# Altium PCB SA100002-FTRAP-B.PcbDoc
Units mm, origin at the board's own origin, x right, y up, seen from the top; angles counter-clockwise.
Board outline 25 x 14 mm, 2 copper layers (Top Layer, Bottom Layer); 7 components, 30 nets, 23 pads, 0 vias.
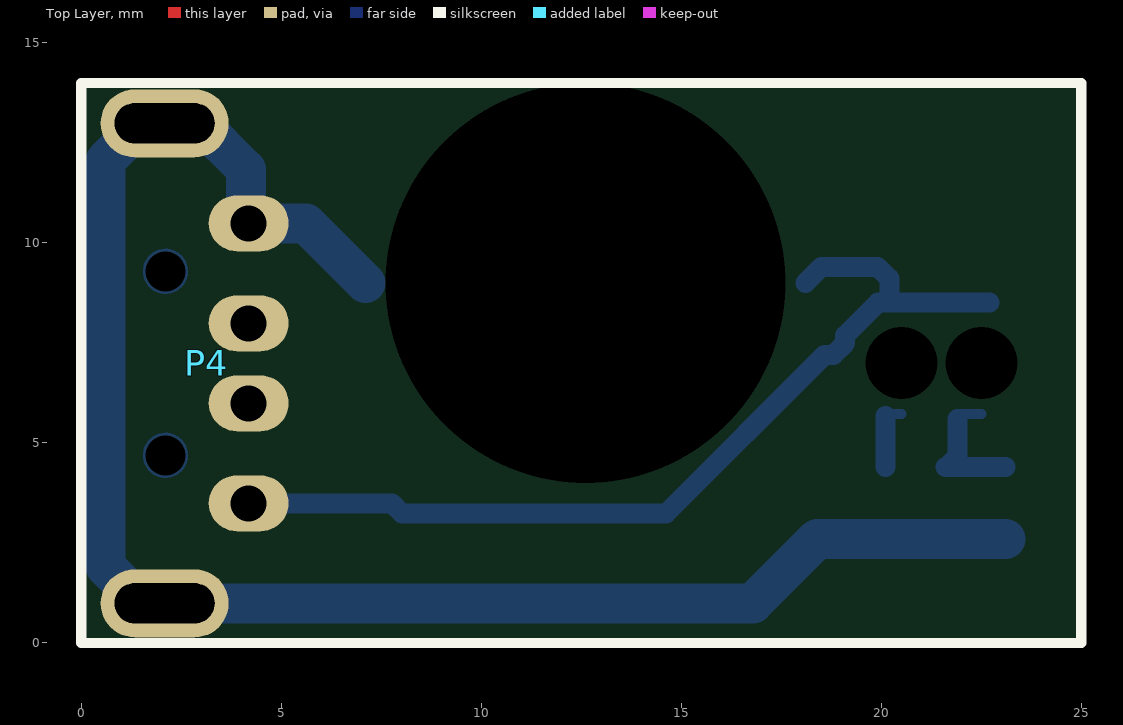
[diagram p0: Top Layer view]
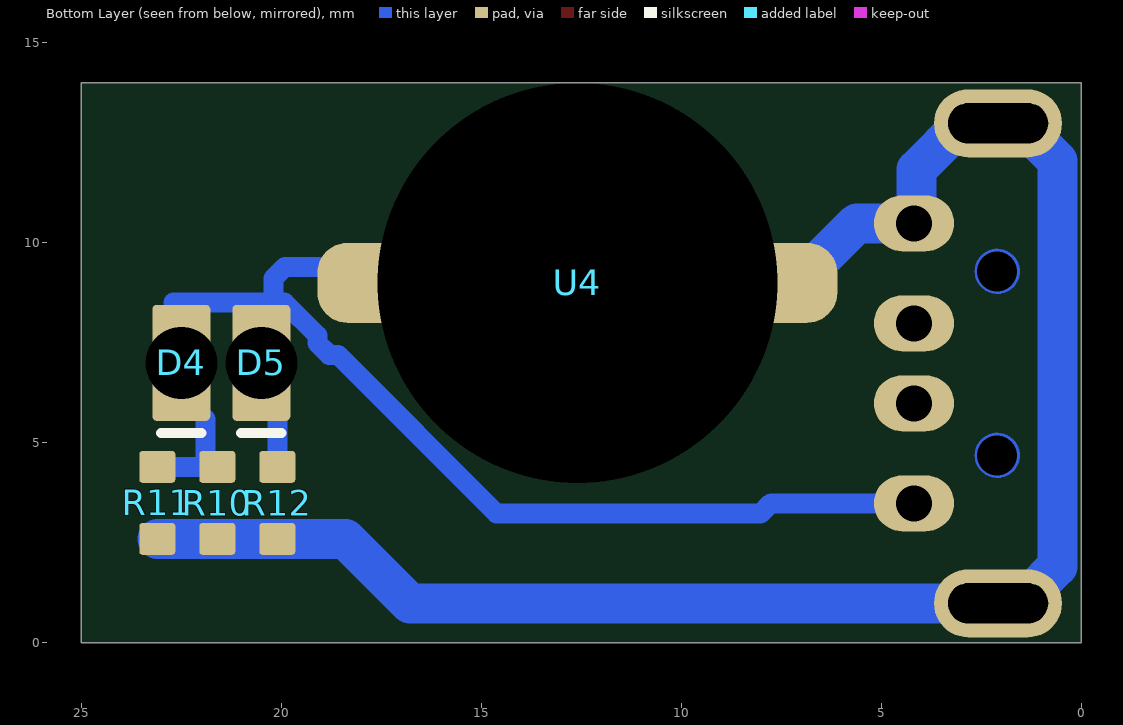
[diagram p1: Bottom Layer view, seen from below]

## Layer stack, top to bottom
Top Solder: solder mask 0.0102, Solder Resist, Dk 3.5
Top Layer: signal copper 0.0356
Dielectric 1: dielectric 0.32, FR-4, Dk 4.8
Bottom Layer: signal copper 0.0356
Bottom Solder: solder mask 0.0102, Solder Resist, Dk 3.5

## Board outline
0,0 0,14 25,14 25,0

## Design rules (kind name [scope] priority, off if disabled: settings)
Clearance [All] p1: gap=0.254 ignorepadtopadclearanceinfootprint=FALSE except(0: Arc-Hole Track-Hole SMDPad-Hole THPad-Hole Via-Hole Fill-Hole Poly-Hole Region-Hole Text-Hole)
DiffPairsRouting [All] p1: maxlimit=0.254 minlimit=0.254 mostfreqgap=0.254 toplayer_minwidth=0.381 toplayer_maxwidth=0.381 toplayer_prefwidth=0.381 bottomlayer_minwidth=0.381 bottomlayer_maxwidth=0.381 bottomlayer_prefwidth=0.381 maxuncoupledlength=12.7
PolygonConnect [All] p1: connectstyle=Relief reliefconductorwidth=0.254 reliefentries=4 polygonreliefangle="90 Angle" airgapwidth=0.254
RoutingVias [All] p1: holewidth=0.711 width=1.27 viastyle="Through Hole" minholewidth=0.711 minwidth=1.27 maxholewidth=0.711 maxwidth=1.27
SolderMaskExpansion [All] p1: expansion=0.102 istentingtop=FALSE
Width [All] p1: maxlimit=2 minlimit=0.254 preferedwidth=0.254 minimp=50.000000 maximp=50.000000 favimp=50.000000
29 further rules are at their usual default settings.

## Classes and differential pairs
differential pair class USB: D0 D1
component class 01-PLAN-B: D4 D5 P4 R11 R12 U4
differential pair D1: +D1_P -D1_N
differential pair D0: +D0_P -D0_N

## Components (designator, comment, footprint, x,y, rotation, side; value= is the part's Value field where it differs from the comment)
D4 "LED" LED_0805_INVERTED 22.5,7 r90 bottom
D5 "LED" LED_0805_INVERTED 20.5,7 r90 bottom
P4 "440247-2" "USB A type r/a male DIP" 3.083,6.988 r270 top
R10 "=Value" R0603_NOSILK 21.6,3.5 r270 bottom
R11 "=Value" R0603_NOSILK 23.1,3.5 r270 bottom
R12 "=Value" R0603_NOSILK 20.1,3.5 r270 bottom
U4 "HCS0905H" HCS09H_THROUGH_HOLE 12.6,9 r270 bottom locked

## Footprints (in the part's own frame and the unit in brackets; to place one, negate y for a bottom-side part, rotate by r counter-clockwise, add the part's x,y. Pads: shape width x height; smd on the part's side, far side on the other; paste and mask are expansions set on the pad)
HCS09H_THROUGH_HOLE [mm]
  rrect75% 2x4 smd: 1(0,4.5) 2(0,-4.5)
  round 1.524 hole 10 unplated: None(0,0)
  body extent -4.5,-4.5 6,4.5
LED_0805_INVERTED [mm]
  oval 0.1x0.11 hole 1.8 unplated: 9(0,0)
  rrect20% 1.1x1.45 smd: A(0.9,0) C(-0.9,0)
  silkscreen extent -1.75,-0.5 -1.75,0.5, body extent -1.01,-0.62 1.01,0.63, height 0.5
R0603_NOSILK [mm]
  rrect20% 0.8x0.9 smd: 1(-0.9,0) 2(0.9,0)
  body extent -0.8,-0.4 0.8,0.4, height 0.45
"USB A type r/a male DIP" [mm]
  oval 1.4x2 hole 0.9: 1(3.5,1.1) 2(1,1.1) 3(-1,1.1) 4(-3.5,1.1)
  round 0.8 hole 1 unplated mask+0: None(-2.3,-0.98) None(2.3,-0.98)
  oval 1.7x3.2 hole 1 slot 2.5 at 90 deg mask+0: SHIELD(-6,-1) SHIELD(6,-1)
  body extent -6.3,-18.7 6.3,1.23, height 3.2

## Part data
D4 D5: "Led General", Package="0805 Dialight", Availability=Unavailable, MF=Dialight, MP=598-8140-107F, Owned=3000, Price=None, SnapEDA_Link=https://www.snapeda.com/parts/598-8140-107F/Dialight/view-part/?ref=snap
P4: library part CON-USB-A, "Mini/Micro USB B Type RCPT", Package=None, Availability=Unavailable, Kosmodrom=http://www.kosmodrom.com.ua/, Price=None, PriceKosmodromUAH=0
R10 R12: library part R0603_470R, "Resistor General", Resistance=470R, Tolerance=5%, Owned=3000, Size=0603
R11: library part R0603_10R, "Resistor General", Resistance=10R, Tolerance=5%, Owned=3000, Size=0603
U4: "5V Buzzer GEN"

## Nets (pads, with @x,y where several pads share a name; then routed paths per layer and width w, separated by ;. In a path a pad name is that pad's centre, name@x,y a point inside that pad or via, vN(x,y) a via of type N, cw(c..) or ccw(c..) an arc to the next point about the centre after c; other vN are vias at no path point)
BUZ: 
BUZ*: 
CTS#: 
D0_N: 
D0_P: 
D1_N: 
D1_P: 
EXT: 
EXT*: 
G1: 
G2: 
GND: P4.4 P4.SHIELD R10.2 R11.2 R12.2 U4.1 | length 47.3
  Bottom Layer w0.254: P4.SHIELD@1.1,12.32 1.768,12.988 2.083,12.988 P4.SHIELD@2.833,12.988 ; P4.SHIELD@1.134,1.646 2.185,1.343 3.419,0.988 2.083,0.988 1.806,1.265 P4.SHIELD@1.246,1.265
  Bottom Layer w1: P4.SHIELD@1.768,12.988 1.522,12.988 1.199,12.665 1.199,12.651 0.6,12.052 0.6,1.91 1.246,1.265 1.522,0.988 P4.SHIELD@2.083,0.988 ; P4.SHIELD@2.833,12.988 2.962,12.988 4.117,11.833 4.117,10.673 4.183,10.607 P4.4 5.612,10.488 U4.1@7.1,9 ; P4.SHIELD@3.419,0.988 16.788,0.988 18.4,2.6 R12.2 R10.2 R11.2
LED1: 
LED2: 
NetC4_2: 
NetD1_C: 
NetD2_C: 
NetD3_C: 
NetD4_C: D4.C R10.1 R11.1 | length 3.5
  Bottom Layer w0.254: D4.C@21.9,5.602 21.902,5.604 21.902,5.677 21.944,5.719 D4.C@22.5,5.719
  Bottom Layer w0.5: R10.1 R10.1@21.65,4.4 ; D4.C@21.9,5.602 21.9,4.65 R10.1@21.65,4.4 ; R11.1 R10.1@21.65,4.4
NetD5_C: D5.C R12.1 | length 1.7
  Bottom Layer w0.254: D5.C@20.1,5.677 20.142,5.719 D5.C@20.5,5.719
  Bottom Layer w0.5: R12.1 D5.C@20.1,5.677
NRST: 
RTS#: 
RXD: 
SWIM: 
TAMP: 
TNOW: 
TXD: 
VBUS: 
VCAP: 
VCC: D4.A D5.A P4.1 U4.2 | length 23.9
  Bottom Layer w0.5: P4.1 7.762,3.488 8.016,3.234 12.166,3.234 14.618,3.234 18.584,7.2 18.803,7.2 19.096,7.493 19.096,7.682 19.918,8.504 20.2,8.504 ; U4.2@18.104,9 18.504,9.4 19.907,9.4 20.2,9.107 20.2,8.504 ; 22.7,8.504 20.2,8.504
pads on no net: D4.9 D5.9 P4.2 P4.3 P4.None U4.None
copper on no net: | length 6.9
  Bottom Layer w0.254: 22.379,6.879 22.5,7 ; 2.542,4.688 ccw(c2.103,4.688) 2.542,4.688 ; 2.542,9.288 ccw(c2.103,9.288) 2.542,9.288 ; 12.8,9 ccw(c12.6,9) 12.8,9

## Silkscreen, mask and mechanical layers (free items; w line width, h text height)
Top Overlay:
  the board outline again, w0.254

## Dimensions
0,0 to 25,0 on Mechanical 13
25,0 to 25,14 on Mechanical 13